# EAGLE board final_board (EAGLE 7.5.0)

Size 128.41 x 80 mm. Coordinates in mm from the lower left corner, seen from the top.
Outline: 28.41,0 128.41,0 128.41,80 28.41,80 28.41,0
Copper layers (1*16): Top 0.035mm / dielectric 1.5mm / Bottom 0.035mm
Design rules "default": minimum track width 10mil, minimum drill 24mil, track to track 8mil, track to pad 8mil, pad to pad 8mil, via to via 8mil, smd to smd 8mil, copper to edge 40mil, drill to drill 8mil, minimum pad ring 10mil, minimum via ring 8mil, stop-mask expansion 4mil, vias tented up to drill 0mil, thermal gap 10mil

## Footprints (pad centres in the part's own frame; a part is rotated, then mirrored left to right if it is on the bottom)
1206 = smd 1.6 x 1.8: 1 -1.4,0; 2 1.4,0
SMA-DO214AC = smd 1.8 x 1.7: A -2.05,0; K 2.05,0
FE06 = drill 0.813 long: 1 -6.35,0; 2 -3.81,0; 3 -1.27,0; 4 1.27,0; 5 3.81,0; 6 6.35,0
TQFP32-08 = smd 1.27 x 0.559: 1 -4.293,2.8; 2 -4.293,2; 3 -4.293,1.2; 4 -4.293,0.4; 5 -4.293,-0.4; 6 -4.293,-1.2; 7 -4.293,-2; 8 -4.293,-2.8; 17 4.293,-2.8; 18 4.293,-2; 19 4.293,-1.2; 20 4.293,-0.4; 21 4.293,0.4; 22 4.293,1.2; 23 4.293,2; 24 4.293,2.8 | smd 0.559 x 1.27: 9 -2.8,-4.293; 10 -2,-4.293; 11 -1.2,-4.293; 12 -0.4,-4.293; 13 0.4,-4.293; 14 1.2,-4.293; 15 2,-4.293; 16 2.8,-4.293; 25 2.8,4.293; 26 2,4.293; 27 1.2,4.293; 28 0.4,4.293; 29 -0.4,4.293; 30 -1.2,4.293; 31 -2,4.293; 32 -2.8,4.293
MA03-2 = drill 1.016: 1 -2.54,-1.27 | drill 1.016 octagon: 2 -2.54,1.27; 3 0,-1.27; 4 0,1.27; 5 2.54,-1.27; 6 2.54,1.27
6410-02 = drill 1.016 long: 1 1.27,0; 2 -1.27,0
JP1 = drill 0.914 long: 1 0,-1.27; 2 0,1.27
L4532M = smd 2 x 2.4: 1 -1.9,0; 2 1.9,0
SML1206 = smd 1.5 x 1.5: A 1.75,0; C -1.75,0
MA04-2 = drill 1.016 octagon: 1 -3.81,-1.27; 2 -3.81,1.27; 3 -1.27,-1.27; 4 -1.27,1.27; 5 1.27,-1.27; 6 1.27,1.27; 7 3.81,-1.27; 8 3.81,1.27
HC49U-V = drill 0.813: 1 -2.413,0; 2 2.413,0
SOT23-W = smd 1.2 x 1.4: 1 -1.1,-1.3; 2 1.1,-1.3 | smd 2.8 x 1.4: 3 0,1.3
TACTILE_SWITCH_SMD = smd 1.524 x 1.27: 1 -2.54,1.905; 2 2.54,1.905; 3 -2.54,-1.905; 4 2.54,-1.905
MA03-1 = drill 1.016 long: 1 -2.54,0; 2 0,0; 3 2.54,0
SOT23-6L = smd 1.27 x 0.635: 1 -1.27,1.27; 2 -1.27,0.32; 3 -1.27,-0.63; 4 1.47,-0.63; 5 1.47,0.32; 6 1.47,1.27
SOT23-5 = smd 0.55 x 1.2: 1 -0.95,-1.3; 2 0,-1.3; 3 0.95,-1.3; 4 0.95,1.3; 5 -0.95,1.3

## Placement (x,y rotation side)
C1  [1206]  11.9,49.53 0 top
C2  [1206]  5.55,49.53 0 top
C3  [1206]  -0.8,49.53 0 top
C4  [1206]  -7.15,49.53 0 top  (outside the outline)
C5  [1206]  -13.5,49.53 0 top  (outside the outline)
C6  [1206]  -19.85,49.53 0 top  (outside the outline)
C7  [1206]  11.9,52.07 0 top
C8  [1206]  5.55,52.07 0 top
C9  [1206]  -0.8,52.07 0 top
C10  [1206]  -2.07,45.72 0 top
C11  [1206]  -9.69,45.72 0 top  (outside the outline)
C12  [1206]  -17.31,45.72 0 top  (outside the outline)
C13  [1206]  -24.93,45.72 0 top  (outside the outline)
D2  SS34  [SMA-DO214AC]  -7.15,15.24 0 top  (outside the outline)
FTDI  [FE06]  6.82,22.86 0 top
IC1  MEGA328P  [TQFP32-08]  10.63,5.08 0 top
ISP  [MA03-2]  -21.12,5.08 0 top  (outside the outline)
J1  power  [6410-02]  0.47,6.35 0 top
JP1  [JP1]  -13.5,15.24 0 top  (outside the outline)
L1  3.3uH  [L4532M]  11.9,16.51 0 top
LED3  [SML1206]  11.9,45.72 0 top
NRF24L01  [MA04-2]  -9.69,5.08 0 top  (outside the outline)
Q1  [HC49U-V]  1.74,15.24 0 top
Q2  [SOT23-W]  -3.34,41.91 0 top
R1  [1206]  5.55,45.72 0 top
R2  10k  [1206]  -8.42,41.91 0 top  (outside the outline)
R3  96k  [1206]  -13.5,41.91 0 top  (outside the outline)
R4  88k  [1206]  -18.58,41.91 0 top  (outside the outline)
R5  12k  [1206]  -23.66,41.91 0 top  (outside the outline)
RESET  [TACTILE_SWITCH_SMD]  11.9,41.91 0 top
SV1  [MA03-1]  -5.88,22.86 0 top  (outside the outline)
SV2  [MA03-1]  -16.04,22.86 0 top  (outside the outline)
SV3  [MA03-1]  10.63,29.21 0 top
SV4  [MA03-1]  0.47,29.21 0 top
SV5  [MA03-1]  -9.69,29.21 0 top  (outside the outline)
SV6  [MA03-1]  -19.85,29.21 0 top  (outside the outline)
SV7  [MA03-1]  10.63,35.56 0 top
SV8  [MA03-1]  0.47,35.56 0 top
SV9  [MA03-1]  -9.69,35.56 0 top  (outside the outline)
SV10  [MA03-1]  -19.85,35.56 0 top  (outside the outline)
U$3  [SOT23-6L]  1.74,40.64 0 top
VTG_REG  MIC5219  [SOT23-5]  5.55,41.91 0 top

## Library data of the parts
C1-C13 Q2 = microbuilder
D2 = diode
FTDI = con-lsta; OC_FARNELL: unknown; OC_NEWARK: unknown
IC1 = atmel; MPN: ATMEGA8-16AU; OC_FARNELL: 9171371; OC_NEWARK: 73M8863
ISP NRF24L01 SV1-SV10 = con-lstb; OC_FARNELL: unknown; OC_NEWARK: unknown
J1 = con-molex; OC_FARNELL: unknown; OC_NEWARK: unknown
JP1 = jumper
L1 = rcl
LED3 = led
Q1 = crystal; OC_FARNELL: 1666969; OC_NEWARK: unknown
R1-R5 RESET VTG_REG = SparkFun
U$3 = fp6291

## Nets
2: C6.1 C9.1 C10.1 NRF24L01.2 Q2.3 U$3.5
5V: C3.1 J1.1 VTG_REG.1 VTG_REG.3
AREF: C8.2 IC1.20
B0: IC1.12
B1: IC1.13
B2: IC1.14
C0: IC1.23 SV5.3
C1: IC1.24 SV4.3
C2: IC1.25 SV3.3
C3: IC1.26 SV2.3
C4: IC1.27 SV1.3
C5: IC1.28
C6: IC1.19
C7: IC1.22
CE: IC1.9 NRF24L01.3
CSN: IC1.10 NRF24L01.4
D2: IC1.32
D3: IC1.1
D4: IC1.2
DTR: C11.1 FTDI.1
GATE: IC1.11 Q2.1
GND: C1.2 C2.1 C3.2 C4.1 C5.2 C6.2 C7.2 C8.1 C9.2 C10.2 C12.2 C13.2 FTDI.5 FTDI.6 IC1.3 IC1.5 IC1.21 ISP.6 J1.2 LED3.C NRF24L01.1 R3.1 R5.1 RESET.2 SV1.1 SV2.1 SV3.1 SV4.1 SV5.1 U$3.2 VTG_REG.2
MISO: IC1.16 ISP.1 NRF24L01.7
MOSI: IC1.15 ISP.4 NRF24L01.6
N$1: C2.2 IC1.7 Q1.2
N$2: C4.2 IC1.8 Q1.1
N$3: JP1.2 R1.2
N$4: LED3.A R1.1
N$14: C7.1 VTG_REG.4
N$16: L1.1 U$3.4
N$21: R3.2 U$3.6
N$22: D2.A L1.2 U$3.1
N$28: R4.1 R5.2 U$3.3
RST: C11.2 IC1.29 ISP.5 R2.1 RESET.3
RX: FTDI.3 IC1.30
SCK: IC1.17 ISP.3 NRF24L01.5
SV1: SV1.2 SV6.2
SV2: SV2.2 SV7.2
SV3: SV3.2 SV8.2
SV4: SV4.2 SV9.2
SV5: SV5.2 SV10.2
TX: FTDI.2 IC1.31
VCC: C1.1 C5.1 FTDI.4 IC1.4 IC1.6 IC1.18 ISP.2 JP1.1 Q2.2 R2.2 SV6.1 SV7.1 SV8.1 SV9.1 SV10.1 VTG_REG.5
VOUT: C12.1 C13.1 D2.K R4.2 SV6.3 SV7.3 SV8.3 SV9.3 SV10.3

## Tracks (layer width: path | path; a pad name or v marks a point on that pad's centre or on a via)
2  (5 unrouted)
5V  (3 unrouted)
AREF  (1 unrouted)
C0  (1 unrouted)
C1  (1 unrouted)
C2  (1 unrouted)
C3  (1 unrouted)
C4  (1 unrouted)
CE  (1 unrouted)
CSN  (1 unrouted)
DTR  (1 unrouted)
GATE  (1 unrouted)
GND  (30 unrouted)
MISO  (2 unrouted)
MOSI  (2 unrouted)
N$1  (2 unrouted)
N$2  (2 unrouted)
N$3  (1 unrouted)
N$4  (1 unrouted)
N$14  (1 unrouted)
N$16  (1 unrouted)
N$21  (1 unrouted)
N$22  (2 unrouted)
N$28  (2 unrouted)
RST  (4 unrouted)
RX  (1 unrouted)
SCK  (2 unrouted)
SV1  (1 unrouted)
SV2  (1 unrouted)
SV3  (1 unrouted)
SV4  (1 unrouted)
SV5  (1 unrouted)
TX  (1 unrouted)
VCC  (15 unrouted)
VOUT  (8 unrouted)